# Altium PCB matrix_8x8_ws2812_LEDs.PcbDoc (part 2 of 2)
Units mm, origin at the board's own origin, x right, y up, seen from the top; angles counter-clockwise.
Board outline 65 x 70 mm, 2 copper layers (Top Layer, Bottom Layer); 134 components, 67 nets, 393 pads, 128 vias.
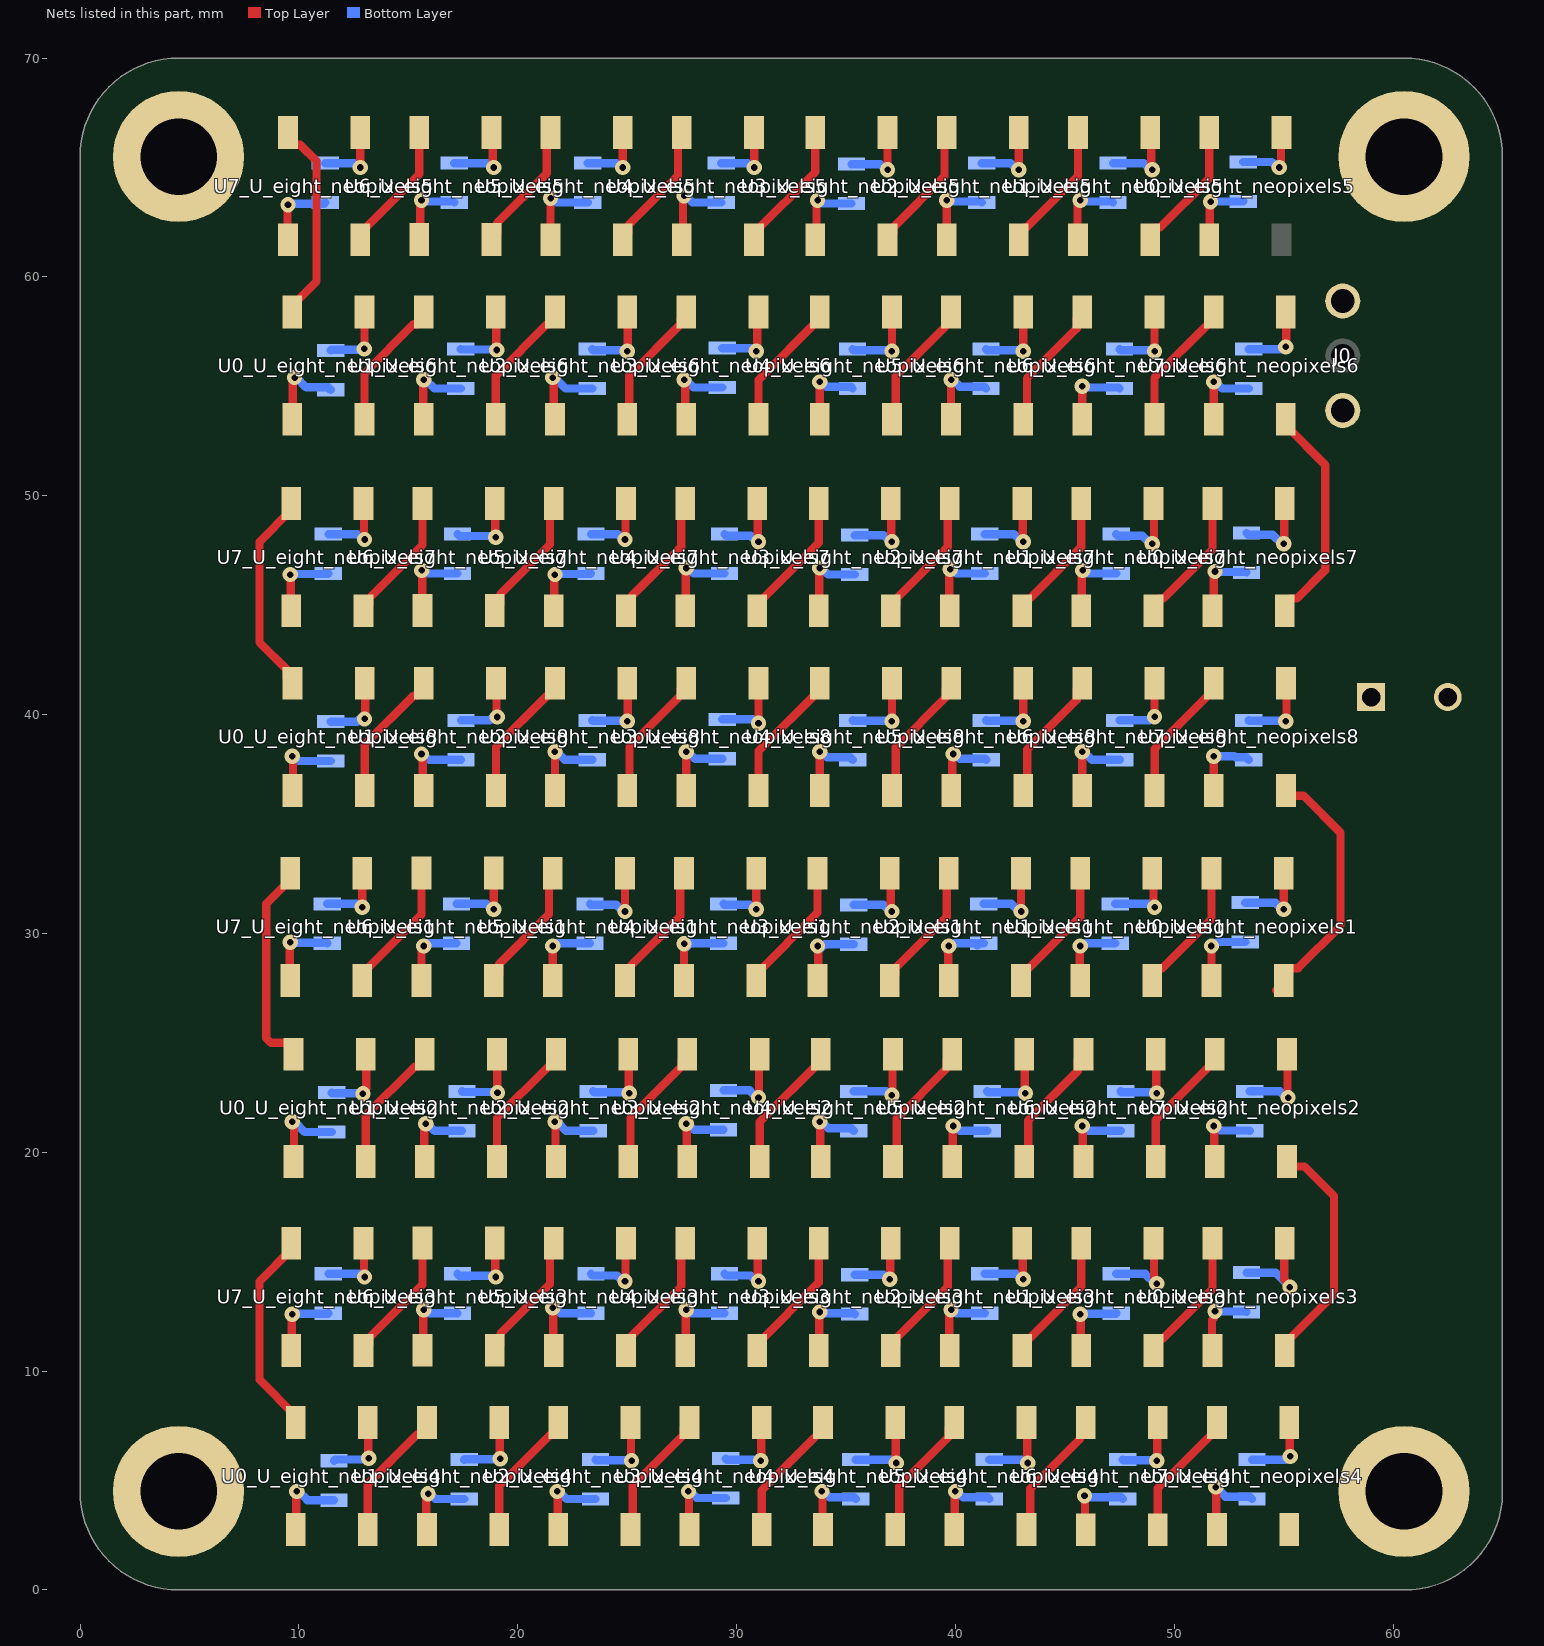
[diagram p2: the nets of this part, all layers, seen from the top]

## Via types
v1: diameter 0.7, hole 0.3, Top Layer to Bottom Layer, 128 vias

## Nets (pads, with @x,y where several pads share a name; then routed paths per layer and width w, separated by ;. In a path a pad name is that pad's centre, name@x,y a point inside that pad or via, vN(x,y) a via of type N, cw(c..) or ccw(c..) an arc to the next point about the centre after c; other vN are vias at no path point) (continued)
GND_U_eight_neopixels1: C0.2 C0_U_eight_neopixels1.1 C0_U_eight_neopixels2.1 C0_U_eight_neopixels3.1 C0_U_eight_neopixels4.1 C0_U_eight_neopixels5.1 C0_U_eight_neopixels6.1 C0_U_eight_neopixels7.1 C0_U_eight_neopixels8.1 C1_U_eight_neopixels1.1 C1_U_eight_neopixels2.1 C1_U_eight_neopixels3.1 C1_U_eight_neopixels4.1 C1_U_eight_neopixels5.1 C1_U_eight_neopixels6.1 C1_U_eight_neopixels7.1 C1_U_eight_neopixels8.1 C2_U_eight_neopixels1.1 C2_U_eight_neopixels2.1 C2_U_eight_neopixels3.1 C2_U_eight_neopixels4.1 C2_U_eight_neopixels5.1 C2_U_eight_neopixels6.1 C2_U_eight_neopixels7.1 C2_U_eight_neopixels8.1 C3_U_eight_neopixels1.1 C3_U_eight_neopixels2.1 C3_U_eight_neopixels3.1 C3_U_eight_neopixels4.1 C3_U_eight_neopixels5.1 C3_U_eight_neopixels6.1 C3_U_eight_neopixels7.1 C3_U_eight_neopixels8.1 C4_U_eight_neopixels1.1 C4_U_eight_neopixels2.1 C4_U_eight_neopixels3.1 C4_U_eight_neopixels4.1 C4_U_eight_neopixels5.1 C4_U_eight_neopixels6.1 C4_U_eight_neopixels7.1 C4_U_eight_neopixels8.1 C5_U_eight_neopixels1.1 C5_U_eight_neopixels2.1 C5_U_eight_neopixels3.1 C5_U_eight_neopixels4.1 C5_U_eight_neopixels5.1 C5_U_eight_neopixels6.1 C5_U_eight_neopixels7.1 C5_U_eight_neopixels8.1 C6_U_eight_neopixels1.1 C6_U_eight_neopixels2.1 C6_U_eight_neopixels3.1 C6_U_eight_neopixels4.1 C6_U_eight_neopixels5.1 C6_U_eight_neopixels6.1 C6_U_eight_neopixels7.1 C6_U_eight_neopixels8.1 C7_U_eight_neopixels1.1 C7_U_eight_neopixels2.1 C7_U_eight_neopixels3.1 C7_U_eight_neopixels4.1 C7_U_eight_neopixels5.1 C7_U_eight_neopixels6.1 C7_U_eight_neopixels7.1 C7_U_eight_neopixels8.1 Designator3.1 Designator4.1 Designator5.1 Designator6.1 J0.3 U0_U_eight_neopixels1.3 U0_U_eight_neopixels2.3 U0_U_eight_neopixels3.3 U0_U_eight_neopixels4.3 U0_U_eight_neopixels5.3 U0_U_eight_neopixels6.3 U0_U_eight_neopixels7.3 U0_U_eight_neopixels8.3 U1_U_eight_neopixels1.3 U1_U_eight_neopixels2.3 U1_U_eight_neopixels3.3 U1_U_eight_neopixels4.3 U1_U_eight_neopixels5.3 U1_U_eight_neopixels6.3 U1_U_eight_neopixels7.3 U1_U_eight_neopixels8.3 U2_U_eight_neopixels1.3 U2_U_eight_neopixels2.3 U2_U_eight_neopixels3.3 U2_U_eight_neopixels4.3 U2_U_eight_neopixels5.3 U2_U_eight_neopixels6.3 U2_U_eight_neopixels7.3 U2_U_eight_neopixels8.3 U3_U_eight_neopixels1.3 U3_U_eight_neopixels2.3 U3_U_eight_neopixels3.3 U3_U_eight_neopixels4.3 U3_U_eight_neopixels5.3 U3_U_eight_neopixels6.3 U3_U_eight_neopixels7.3 U3_U_eight_neopixels8.3 U4_U_eight_neopixels1.3 U4_U_eight_neopixels2.3 U4_U_eight_neopixels3.3 U4_U_eight_neopixels4.3 U4_U_eight_neopixels5.3 U4_U_eight_neopixels6.3 U4_U_eight_neopixels7.3 U4_U_eight_neopixels8.3 U5_U_eight_neopixels1.3 U5_U_eight_neopixels2.3 U5_U_eight_neopixels3.3 U5_U_eight_neopixels4.3 U5_U_eight_neopixels5.3 U5_U_eight_neopixels6.3 U5_U_eight_neopixels7.3 U5_U_eight_neopixels8.3 U6_U_eight_neopixels1.3 U6_U_eight_neopixels2.3 U6_U_eight_neopixels3.3 U6_U_eight_neopixels4.3 U6_U_eight_neopixels5.3 U6_U_eight_neopixels6.3 U6_U_eight_neopixels7.3 U6_U_eight_neopixels8.3 U7_U_eight_neopixels1.3 U7_U_eight_neopixels2.3 U7_U_eight_neopixels3.3 U7_U_eight_neopixels4.3 U7_U_eight_neopixels5.3 U7_U_eight_neopixels6.3 U7_U_eight_neopixels7.3 U7_U_eight_neopixels8.3 | length 221.1
  Top Layer w0.381: U7_U_eight_neopixels5.3@9.5,61.7 9.476,61.724 9.476,63.276 v1(9.5,63.3) ; U7_U_eight_neopixels1.3@9.6,27.85 9.576,27.874 9.576,29.576 v1(9.6,29.6) ; v1(9.6,46.4) 9.624,46.376 9.624,44.769 U7_U_eight_neopixels7.3@9.648,44.745 ; U7_U_eight_neopixels3.3@9.648,10.945 9.674,10.971 9.674,12.574 v1(9.7,12.6) ; v1(12.925,22.675) 12.925,22.761 13.076,22.911 13.076,24.456 U0_U_eight_neopixels2.3@13.052,24.481 ; v1(12.99,56.71) 12.995,56.715 12.995,58.395 U0_U_eight_neopixels6.3@13,58.4 ; U0_U_eight_neopixels8.3@13.004,41.434 13.028,41.41 13.028,40.003 v1@13.052,39.979 ; U0_U_eight_neopixels4.3@13.152,7.655 13.17,7.637 13.17,6.03 v1(13.188,6.012) ; U6_U_eight_neopixels5.3@15.502,61.705 15.551,61.754 15.551,63.451 v1(15.6,63.5) ; v1@15.6,29.35 15.601,29.349 15.601,27.856 U6_U_eight_neopixels1.3@15.602,27.855 ; v1(15.612,46.588) 15.631,46.569 15.631,44.769 U6_U_eight_neopixels7.3@15.65,44.75 ; U6_U_eight_neopixels3.3@15.65,10.95 15.675,10.975 15.675,12.775 v1(15.7,12.8) ; U1_U_eight_neopixels6.3@19,58.4 19.02,58.38 19.02,56.68 v1(19.04,56.66) ; U1_U_eight_neopixels8.3@19.004,41.434 19.028,41.41 19.028,40.003 v1@19.052,39.979 ; U1_U_eight_neopixels2.3@19.052,24.481 19.064,24.469 19.064,22.736 v1(19.075,22.725) ; U1_U_eight_neopixels4.3@19.152,7.655 19.176,7.631 19.176,6.024 v1(19.2,6) ; U5_U_eight_neopixels5.3@21.5,61.7 v1(21.5,63.6) ; v1(21.6,12.9) 21.624,12.876 21.624,10.969 U5_U_eight_neopixels3.3@21.648,10.945 ; U5_U_eight_neopixels1.3@21.6,27.85 v1(21.6,29.426) ; U5_U_eight_neopixels7.3@21.648,44.745 21.674,44.771 21.674,46.374 v1(21.7,46.4) ; v1(25,39.7) 25.028,39.728 25.028,41.41 U2_U_eight_neopixels8.3@25.004,41.434 ; v1(25,56.6) 25.024,56.624 25.024,58.376 U2_U_eight_neopixels6.3@25,58.4 ; U2_U_eight_neopixels2.3@25.052,24.481 25.076,24.456 25.076,22.724 v1(25.1,22.7) ; U2_U_eight_neopixels4.3@25.152,7.655 25.176,7.631 25.176,5.924 v1(25.2,5.9) ; U4_U_eight_neopixels5.3@27.5,61.7 27.55,61.75 27.55,63.65 v1(27.6,63.7) ; U4_U_eight_neopixels1.3@27.6,27.85 v1@27.6,29.35 ; U4_U_eight_neopixels3.3@27.648,10.945 27.674,10.971 27.674,12.774 v1(27.7,12.8) ; U4_U_eight_neopixels7.3@27.648,44.745 27.674,44.771 27.674,46.674 v1(27.7,46.7) ; v1(30.9,56.6) 30.95,56.65 30.95,58.35 U3_U_eight_neopixels6.3@31,58.4 ; v1(31,22.5) 31.026,22.526 31.026,24.455 U3_U_eight_neopixels2.3@31.052,24.481 ; v1(31,39.6) 31.002,39.602 31.002,41.432 U3_U_eight_neopixels8.3@31.004,41.434 ; v1(31.1,5.9) 31.126,5.926 31.126,7.629 U3_U_eight_neopixels4.3@31.152,7.655 ; U3_U_eight_neopixels5.3@33.6,61.7 33.65,61.75 33.65,63.45 v1(33.7,63.5) ; U3_U_eight_neopixels1.3@33.7,27.85 33.726,27.876 33.726,29.279 v1@33.752,29.305 ; U3_U_eight_neopixels3.3@33.748,10.945 33.774,10.971 33.774,12.674 v1(33.8,12.7) ; U3_U_eight_neopixels7.3@33.748,44.745 33.774,44.771 33.774,46.674 v1(33.8,46.7) ; v1(37.1,22.6) 37.126,22.626 37.126,24.455 U4_U_eight_neopixels2.3@37.152,24.481 ; v1(37.1,39.7) 37.102,39.702 37.102,41.433 U4_U_eight_neopixels8.3@37.104,41.435 ; v1(37.1,56.6) U4_U_eight_neopixels6.3@37.1,58.4 ; U4_U_eight_neopixels4.3@37.252,7.655 37.276,7.631 37.276,5.824 v1(37.3,5.8) ; U2_U_eight_neopixels5.3@39.6,61.7 v1(39.6,63.5) ; v1@39.652,29.305 39.652,29.302 39.6,29.25 39.676,29.174 39.676,27.874 U2_U_eight_neopixels1.3@39.7,27.85 ; U2_U_eight_neopixels3.3@39.748,10.945 39.724,10.969 39.724,12.638 39.8,12.714 v1(39.8,12.8) ; U2_U_eight_neopixels7.3@39.748,44.745 39.724,44.769 39.724,46.6 v1(39.762,46.638) ; v1(43.1,39.7) 43.102,39.702 43.102,41.433 U5_U_eight_neopixels8.3@43.104,41.435 ; v1(43.1,56.6) U5_U_eight_neopixels6.3@43.1,58.4 ; U5_U_eight_neopixels2.3@43.152,24.481 43.176,24.457 43.176,22.724 v1(43.2,22.7) ; U5_U_eight_neopixels4.3@43.252,7.655 43.276,7.631 43.276,5.824 v1(43.3,5.8) ; U1_U_eight_neopixels5.3@45.6,61.7 45.576,61.724 45.576,63.29 45.7,63.414 v1(45.7,63.5) ; v1@45.652,29.305 45.676,29.281 45.676,27.874 U1_U_eight_neopixels1.3@45.7,27.85 ; v1(45.7,12.6) 45.724,12.576 45.724,10.969 U1_U_eight_neopixels3.3@45.748,10.945 ; U1_U_eight_neopixels7.3@45.748,44.745 45.78,44.777 45.78,46.556 v1(45.812,46.588) ; U6_U_eight_neopixels6.3@49.098,58.395 49.099,58.394 49.099,56.601 v1(49.1,56.6) ; v1(49.1,39.9) 49.101,39.901 U6_U_eight_neopixels8.3@49.102,41.43 U6_U_eight_neopixels8.3@49.102,41.43 ; U6_U_eight_neopixels2.3@49.15,24.476 49.175,24.451 49.175,22.725 v1(49.2,22.7) ; v1(49.2,5.9) 49.225,5.925 49.225,7.625 U6_U_eight_neopixels4.3@49.25,7.65 ; U0_U_eight_neopixels5.3@51.6,61.7 51.63,61.73 51.63,63.41 v1(51.66,63.44) ; U0_U_eight_neopixels1.3@51.7,27.85 v1(51.7,29.426) ; U0_U_eight_neopixels3.3@51.748,10.945 51.724,10.969 51.724,12.338 51.801,12.414 51.801,12.677 v1(51.862,12.738) ; U0_U_eight_neopixels7.3@51.748,44.745 51.805,44.802 51.805,46.481 v1(51.862,46.538) ; v1(55.1,39.7) 55.128,39.728 55.128,41.41 U7_U_eight_neopixels8.3@55.104,41.435 ; U7_U_eight_neopixels6.3@55.1,58.4 55.124,58.376 55.124,56.976 55.155,56.945 v1@55.148,56.945 ; U7_U_eight_neopixels2.3@55.152,24.481 55.176,24.457 55.176,22.524 v1(55.2,22.5) ; U7_U_eight_neopixels4.3@55.252,7.655 55.276,7.631 55.276,6.124 v1(55.3,6.1)
  Bottom Layer w0.381: v1(9.5,63.3) 9.55,63.35 11.15,63.35 C3_U_eight_neopixels5.1@11.2,63.4 ; v1(9.6,29.6) 9.625,29.575 11.275,29.575 C3_U_eight_neopixels1.1@11.3,29.55 ; v1(9.6,46.4) 9.622,46.422 11.326,46.422 C3_U_eight_neopixels7.1@11.348,46.445 ; v1(9.7,12.6) 9.723,12.622 11.326,12.622 C3_U_eight_neopixels3.1@11.348,12.645 ; C4_U_eight_neopixels6.1@11.448,56.645 11.481,56.678 12.957,56.678 v1(12.99,56.71) ; C4_U_eight_neopixels8.1@11.452,39.679 12.666,39.679 12.966,39.979 v1@13.052,39.979 ; C4_U_eight_neopixels2.1@11.5,22.726 11.525,22.7 12.9,22.7 v1(12.925,22.675) ; C4_U_eight_neopixels4.1@11.6,5.9 11.656,5.956 13.132,5.956 v1(13.188,6.012) ; v1@15.6,29.35 15.686,29.35 15.886,29.55 C2_U_eight_neopixels1.1@17.2,29.55 ; v1(15.6,63.5) 15.65,63.45 17.05,63.45 C2_U_eight_neopixels5.1@17.1,63.4 ; v1(15.612,46.588) 15.698,46.588 15.841,46.445 C2_U_eight_neopixels7.1@17.248,46.445 ; v1(15.7,12.8) 15.786,12.8 15.941,12.645 C2_U_eight_neopixels3.1@17.248,12.645 ; C5_U_eight_neopixels6.1@17.4,56.7 17.42,56.68 19.02,56.68 v1(19.04,56.66) ; C5_U_eight_neopixels8.1@17.404,39.734 18.721,39.734 18.966,39.979 v1@19.052,39.979 ; C5_U_eight_neopixels2.1@17.452,22.781 17.48,22.753 19.047,22.753 v1(19.075,22.725) ; C5_U_eight_neopixels4.1@17.552,5.955 17.575,5.977 19.177,5.977 v1(19.2,6) ; v1(21.5,63.6) 21.586,63.6 21.786,63.4 C1_U_eight_neopixels5.1@23.2,63.4 ; v1(21.6,12.9) 21.686,12.9 21.941,12.645 C1_U_eight_neopixels3.1@23.348,12.645 ; v1(21.6,29.426) 21.686,29.426 21.811,29.55 C1_U_eight_neopixels1.1@23.3,29.55 ; v1(21.7,46.4) 21.722,46.422 23.326,46.422 C1_U_eight_neopixels7.1@23.348,46.445 ; C6_U_eight_neopixels6.1@23.4,56.7 23.45,56.65 24.95,56.65 v1(25,56.6) ; C6_U_eight_neopixels8.1@23.404,39.734 23.421,39.717 24.983,39.717 v1(25,39.7) ; C6_U_eight_neopixels2.1@23.452,22.781 23.492,22.74 25.06,22.74 v1(25.1,22.7) ; C6_U_eight_neopixels4.1@23.552,5.955 23.58,5.927 25.173,5.927 v1(25.2,5.9) ; v1@27.6,29.35 27.686,29.35 27.886,29.55 C0_U_eight_neopixels1.1@29.4,29.55 ; v1(27.6,63.7) 27.686,63.7 27.986,63.4 C0_U_eight_neopixels5.1@29.3,63.4 ; v1(27.7,12.8) 27.786,12.8 27.941,12.645 C0_U_eight_neopixels3.1@29.448,12.645 ; v1(27.7,46.7) 27.786,46.7 28.041,46.445 C0_U_eight_neopixels7.1@29.448,46.445 ; C7_U_eight_neopixels6.1@29.348,56.745 30.669,56.745 30.814,56.6 v1(30.9,56.6) ; C7_U_eight_neopixels8.1@29.352,39.779 30.734,39.779 30.914,39.6 v1(31,39.6) ; C7_U_eight_neopixels2.1@29.4,22.826 30.596,22.826 30.922,22.5 v1(31,22.5) ; C7_U_eight_neopixels4.1@29.5,6 29.55,5.95 31.05,5.95 v1(31.1,5.9) ; v1(33.7,63.5) 33.786,63.5 33.931,63.355 C7_U_eight_neopixels5.1@35.252,63.355 ; v1@33.752,29.305 33.838,29.305 34.038,29.505 C7_U_eight_neopixels1.1@35.352,29.505 ; v1(33.8,12.7) 33.85,12.65 35.35,12.65 C7_U_eight_neopixels3.1@35.4,12.6 ; v1(33.8,46.7) 33.886,46.7 34.186,46.4 C7_U_eight_neopixels7.1@35.4,46.4 ; C0_U_eight_neopixels6.1@35.3,56.7 35.35,56.65 37.05,56.65 v1(37.1,56.6) ; C0_U_eight_neopixels8.1@35.304,39.734 35.321,39.717 37.083,39.717 v1(37.1,39.7) ; C0_U_eight_neopixels2.1@35.352,22.781 36.833,22.781 37.014,22.6 v1(37.1,22.6) ; C0_U_eight_neopixels4.1@35.452,5.955 37.059,5.955 37.214,5.8 v1(37.3,5.8) ; v1(39.6,63.5) 39.65,63.45 41.15,63.45 C6_U_eight_neopixels5.1@41.2,63.4 ; v1@39.652,29.305 39.738,29.305 39.983,29.55 40.9,29.55 41,29.45 41.1,29.55 C6_U_eight_neopixels1.1@41.3,29.55 ; v1(39.762,46.638) 39.848,46.638 40.041,46.445 C6_U_eight_neopixels7.1@41.348,46.445 ; v1(39.8,12.8) 39.886,12.8 40.041,12.645 C6_U_eight_neopixels3.1@41.348,12.645 ; C1_U_eight_neopixels6.1@41.4,56.7 41.45,56.65 43.05,56.65 v1(43.1,56.6) ; C1_U_eight_neopixels8.1@41.404,39.734 41.421,39.717 43.083,39.717 v1(43.1,39.7) ; C1_U_eight_neopixels2.1@41.452,22.781 41.492,22.74 43.16,22.74 v1(43.2,22.7) ; C1_U_eight_neopixels4.1@41.552,5.955 43.059,5.955 43.214,5.8 v1(43.3,5.8) ; v1@45.652,29.305 45.738,29.305 45.983,29.55 C5_U_eight_neopixels1.1@47.3,29.55 ; v1(45.7,12.6) 45.722,12.622 47.326,12.622 C5_U_eight_neopixels3.1@47.348,12.645 ; v1(45.7,63.5) 45.75,63.45 47.15,63.45 C5_U_eight_neopixels5.1@47.2,63.4 ; v1(45.812,46.588) 45.898,46.588 46.041,46.445 C5_U_eight_neopixels7.1@47.348,46.445 ; C2_U_eight_neopixels6.1@47.5,56.7 47.55,56.65 49.05,56.65 v1(49.1,56.6) ; C2_U_eight_neopixels8.1@47.504,39.734 48.848,39.734 49.014,39.9 v1(49.1,39.9) ; C2_U_eight_neopixels2.1@47.552,22.781 47.592,22.74 49.16,22.74 v1(49.2,22.7) ; C2_U_eight_neopixels4.1@47.652,5.955 47.68,5.927 49.173,5.927 v1(49.2,5.9) ; v1(51.66,63.44) 51.668,63.447 53.144,63.447 C4_U_eight_neopixels5.1@53.152,63.455 ; v1(51.7,29.426) 51.786,29.426 51.966,29.605 C4_U_eight_neopixels1.1@53.252,29.605 ; v1(51.862,12.738) 51.881,12.719 53.281,12.719 C4_U_eight_neopixels3.1@53.3,12.7 ; v1(51.862,46.538) 51.881,46.519 53.281,46.519 C4_U_eight_neopixels7.1@53.3,46.5 ; C3_U_eight_neopixels6.1@53.4,56.7 54.817,56.7 55.062,56.945 v1@55.148,56.945 ; C3_U_eight_neopixels8.1@53.404,39.734 53.421,39.717 55.083,39.717 v1(55.1,39.7) ; C3_U_eight_neopixels2.1@53.452,22.781 54.833,22.781 55.114,22.5 v1(55.2,22.5) ; C3_U_eight_neopixels4.1@53.552,5.955 55.069,5.955 55.214,6.1 v1(55.3,6.1)
  other v1: 15.7,29.426 33.7,29.426 39.7,29.426 45.7,29.426 27.6,29.526 13,39.8 19.06,39.89 55.1,56.8
NetU0_U_eight_neopixels1_2: U0_U_eight_neopixels1.2 U1_U_eight_neopixels1.4 | length 6.1
  Top Layer w0.381: U1_U_eight_neopixels1.4@49,27.85 49,28.15 49.259,28.41 49.457,28.41 51.7,30.653 U0_U_eight_neopixels1.2@51.7,32.75
NetU0_U_eight_neopixels1_4: U0_U_eight_neopixels1.4 U7_U_eight_neopixels8.2 | length 12
  Top Layer w0.381: U0_U_eight_neopixels1.4@54.648,27.395 55.051,27.799 55.051,28.201 55.26,28.41 55.662,28.41 57.6,30.347 57.6,34.6 55.902,36.298 55.341,36.298 U7_U_eight_neopixels8.2@55.104,36.535
NetU0_U_eight_neopixels2_2: U0_U_eight_neopixels2.2 U1_U_eight_neopixels2.4 | length 6.1
  Top Layer w0.381: U0_U_eight_neopixels2.2@13.052,19.581 13.052,21.678 15.295,23.921 15.493,23.921 15.752,24.181 U1_U_eight_neopixels2.4@15.752,24.481
NetU0_U_eight_neopixels2_4: U0_U_eight_neopixels2.4 U7_U_eight_neopixels1.2 | length 9.7
  Top Layer w0.381: U7_U_eight_neopixels1.2@9.6,32.75 9.6,32.45 8.5,31.35 8.5,25.223 8.723,25 9.492,25 9.752,24.74 U0_U_eight_neopixels2.4@9.752,24.481
NetU0_U_eight_neopixels3_2: U0_U_eight_neopixels3.2 U1_U_eight_neopixels3.4 | length 6.1
  Top Layer w0.381: U1_U_eight_neopixels3.4@49.048,10.945 49.048,11.245 49.308,11.504 49.505,11.504 51.748,13.748 U0_U_eight_neopixels3.2@51.748,15.845
NetU0_U_eight_neopixels3_4: U0_U_eight_neopixels3.4 U7_U_eight_neopixels2.2 | length 10.8
  Top Layer w0.381: U0_U_eight_neopixels3.4@55.048,10.945 55.048,11.245 57.3,13.497 57.3,18 55.95,19.35 55.383,19.35 U7_U_eight_neopixels2.2@55.152,19.581
NetU0_U_eight_neopixels4_2: U0_U_eight_neopixels4.2 U1_U_eight_neopixels4.4 | length 6.1
  Top Layer w0.381: U0_U_eight_neopixels4.2@13.152,2.755 13.152,4.852 15.396,7.095 15.593,7.095 15.852,7.355 U1_U_eight_neopixels4.4@15.852,7.655
NetU0_U_eight_neopixels4_4: U0_U_eight_neopixels4.4 U7_U_eight_neopixels3.2 | length 9.5
  Top Layer w0.381: U7_U_eight_neopixels3.2@9.648,15.845 9.648,15.545 8.2,14.097 8.2,9.607 9.852,7.955 U0_U_eight_neopixels4.4@9.852,7.655
NetU0_U_eight_neopixels5_2: U0_U_eight_neopixels5.2 U1_U_eight_neopixels5.4 | length 6.1
  Top Layer w0.381: U1_U_eight_neopixels5.4@48.9,61.7 48.9,62 49.16,62.259 49.357,62.259 51.6,64.503 U0_U_eight_neopixels5.2@51.6,66.6
NetU0_U_eight_neopixels6_2: U0_U_eight_neopixels6.2 U1_U_eight_neopixels6.4 | length 6.1
  Top Layer w0.381: U0_U_eight_neopixels6.2@13,53.5 13,55.597 15.244,57.84 15.441,57.84 15.7,58.1 U1_U_eight_neopixels6.4@15.7,58.4
NetU0_U_eight_neopixels6_4: U0_U_eight_neopixels6.4 U7_U_eight_neopixels5.2 | length 9.4
  Top Layer w0.381: U7_U_eight_neopixels5.2@9.5,66.6 9.5,66.3 9.76,66.04 10.06,66.04 10.8,65.3 10.8,59.8 9.7,58.7 U0_U_eight_neopixels6.4@9.7,58.4
NetU0_U_eight_neopixels7_2: U0_U_eight_neopixels7.2 U1_U_eight_neopixels7.4 | length 6.1
  Top Layer w0.381: U1_U_eight_neopixels7.4@49.048,44.745 49.048,45.045 49.308,45.304 49.505,45.304 51.748,47.548 U0_U_eight_neopixels7.2@51.748,49.645
NetU0_U_eight_neopixels7_4: U0_U_eight_neopixels7.4 U7_U_eight_neopixels6.2 | length 10.4
  Top Layer w0.381: U0_U_eight_neopixels7.4@55.048,44.745 55.048,45.045 55.308,45.304 55.608,45.304 56.9,46.597 56.9,51.4 55.1,53.2 U7_U_eight_neopixels6.2@55.1,53.5
NetU0_U_eight_neopixels8_2: U0_U_eight_neopixels8.2 U1_U_eight_neopixels8.4 | length 6.1
  Top Layer w0.381: U0_U_eight_neopixels8.2@13.004,36.534 13.004,38.631 15.248,40.875 15.445,40.875 15.704,41.134 U1_U_eight_neopixels8.4@15.704,41.434
NetU0_U_eight_neopixels8_4: U0_U_eight_neopixels8.4 U7_U_eight_neopixels7.2 | length 9.4
  Top Layer w0.381: U7_U_eight_neopixels7.2@9.648,49.645 9.648,49.345 8.2,47.897 8.2,43.3 9.444,42.056 9.444,41.694 U0_U_eight_neopixels8.4@9.704,41.434
NetU1_U_eight_neopixels1_2: U1_U_eight_neopixels1.2 U2_U_eight_neopixels1.4 | length 6.1
  Top Layer w0.381: U2_U_eight_neopixels1.4@43,27.85 43,28.15 43.259,28.41 43.356,28.41 45.699,30.752 45.699,32.749 U1_U_eight_neopixels1.2@45.7,32.75
NetU1_U_eight_neopixels2_2: U1_U_eight_neopixels2.2 U2_U_eight_neopixels2.4 | length 6.1
  Top Layer w0.381: U1_U_eight_neopixels2.2@19.052,19.581 19.053,19.582 19.053,21.579 21.395,23.921 21.492,23.921 21.752,24.181 U2_U_eight_neopixels2.4@21.752,24.481
NetU1_U_eight_neopixels3_2: U1_U_eight_neopixels3.2 U2_U_eight_neopixels3.4 | length 6.1
  Top Layer w0.381: U2_U_eight_neopixels3.4@43.048,10.945 43.048,11.245 43.308,11.504 43.405,11.504 45.747,13.847 45.747,15.844 U1_U_eight_neopixels3.2@45.748,15.845
NetU1_U_eight_neopixels4_2: U1_U_eight_neopixels4.2 U2_U_eight_neopixels4.4 | length 6.1
  Top Layer w0.381: U1_U_eight_neopixels4.2@19.152,2.755 19.153,2.756 19.153,4.753 21.496,7.095 21.593,7.095 21.852,7.355 U2_U_eight_neopixels4.4@21.852,7.655
NetU1_U_eight_neopixels5_2: U1_U_eight_neopixels5.2 U2_U_eight_neopixels5.4 | length 6.1
  Top Layer w0.381: U2_U_eight_neopixels5.4@42.9,61.7 42.9,62 43.16,62.259 43.257,62.259 45.599,64.602 45.599,66.599 U1_U_eight_neopixels5.2@45.6,66.6
NetU1_U_eight_neopixels6_2: U1_U_eight_neopixels6.2 U2_U_eight_neopixels6.4 | length 6.1
  Top Layer w0.381: U1_U_eight_neopixels6.2@19,53.5 19.001,53.501 19.001,55.498 21.344,57.84 21.441,57.84 21.7,58.1 U2_U_eight_neopixels6.4@21.7,58.4
NetU1_U_eight_neopixels7_2: U1_U_eight_neopixels7.2 U2_U_eight_neopixels7.4 | length 6.1
  Top Layer w0.381: U2_U_eight_neopixels7.4@43.048,44.745 43.048,45.045 43.308,45.304 43.405,45.304 45.747,47.647 45.747,49.644 U1_U_eight_neopixels7.2@45.748,49.645
NetU1_U_eight_neopixels8_2: U1_U_eight_neopixels8.2 U2_U_eight_neopixels8.4 | length 6.1
  Top Layer w0.381: U1_U_eight_neopixels8.2@19.004,36.534 19.005,36.536 19.005,38.533 21.348,40.875 21.445,40.875 21.704,41.134 U2_U_eight_neopixels8.4@21.704,41.434
NetU2_U_eight_neopixels1_2: U2_U_eight_neopixels1.2 U3_U_eight_neopixels1.4 | length 6
  Top Layer w0.381: U3_U_eight_neopixels1.4@37,27.85 37.26,28.11 37.26,28.413 39.599,30.752 39.599,32.649 U2_U_eight_neopixels1.2@39.7,32.75
NetU2_U_eight_neopixels2_2: U2_U_eight_neopixels2.2 U3_U_eight_neopixels2.4 | length 6
  Top Layer w0.381: U2_U_eight_neopixels2.2@25.052,19.581 25.153,19.682 25.153,21.579 27.492,23.918 27.492,24.221 U3_U_eight_neopixels2.4@27.752,24.481
NetU2_U_eight_neopixels3_2: U2_U_eight_neopixels3.2 U3_U_eight_neopixels3.4 | length 6
  Top Layer w0.381: U3_U_eight_neopixels3.4@37.048,10.945 37.308,11.204 37.308,11.508 39.647,13.847 39.647,15.744 U2_U_eight_neopixels3.2@39.748,15.845
NetU2_U_eight_neopixels4_2: U2_U_eight_neopixels4.2 U3_U_eight_neopixels4.4 | length 6
  Top Layer w0.381: U2_U_eight_neopixels4.2@25.152,2.755 25.253,2.856 25.253,4.753 27.593,7.092 27.593,7.395 U3_U_eight_neopixels4.4@27.852,7.655
NetU2_U_eight_neopixels5_2: U2_U_eight_neopixels5.2 U3_U_eight_neopixels5.4 | length 6
  Top Layer w0.381: U3_U_eight_neopixels5.4@36.9,61.7 37.16,61.959 37.16,62.262 39.499,64.602 39.499,66.499 U2_U_eight_neopixels5.2@39.6,66.6
NetU2_U_eight_neopixels6_2: U2_U_eight_neopixels6.2 U3_U_eight_neopixels6.4 | length 6
  Top Layer w0.381: U2_U_eight_neopixels6.2@25,53.5 25.101,53.601 25.101,55.498 27.44,57.837 27.44,58.14 U3_U_eight_neopixels6.4@27.7,58.4
NetU2_U_eight_neopixels7_2: U2_U_eight_neopixels7.2 U3_U_eight_neopixels7.4 | length 6
  Top Layer w0.381: U3_U_eight_neopixels7.4@37.048,44.745 37.308,45.004 37.308,45.308 39.647,47.647 39.647,49.544 U2_U_eight_neopixels7.2@39.748,49.645
NetU2_U_eight_neopixels8_2: U2_U_eight_neopixels8.2 U3_U_eight_neopixels8.4 | length 6
  Top Layer w0.381: U2_U_eight_neopixels8.2@25.004,36.534 25.105,36.636 25.105,38.533 27.444,40.872 27.444,41.175 U3_U_eight_neopixels8.4@27.704,41.434
NetU3_U_eight_neopixels1_2: U3_U_eight_neopixels1.2 U4_U_eight_neopixels1.4 | length 6.1
  Top Layer w0.381: U4_U_eight_neopixels1.4@30.9,27.85 30.9,28.15 33.7,30.95 U3_U_eight_neopixels1.2@33.7,32.75
NetU3_U_eight_neopixels2_2: U3_U_eight_neopixels2.2 U4_U_eight_neopixels2.4 | length 6.1
  Top Layer w0.381: U3_U_eight_neopixels2.2@31.052,19.581 31.052,21.381 33.852,24.181 U4_U_eight_neopixels2.4@33.852,24.481
NetU3_U_eight_neopixels3_2: U3_U_eight_neopixels3.2 U4_U_eight_neopixels3.4 | length 6.1
  Top Layer w0.381: U4_U_eight_neopixels3.4@30.948,10.945 30.948,11.245 33.748,14.045 U3_U_eight_neopixels3.2@33.748,15.845
NetU3_U_eight_neopixels4_2: U3_U_eight_neopixels4.2 U4_U_eight_neopixels4.4 | length 6.1
  Top Layer w0.381: U3_U_eight_neopixels4.2@31.152,2.755 31.152,4.555 33.952,7.355 U4_U_eight_neopixels4.4@33.952,7.655
NetU3_U_eight_neopixels5_2: U3_U_eight_neopixels5.2 U4_U_eight_neopixels5.4 | length 6.1
  Top Layer w0.381: U4_U_eight_neopixels5.4@30.8,61.7 30.8,62 33.6,64.8 U3_U_eight_neopixels5.2@33.6,66.6
NetU3_U_eight_neopixels6_2: U3_U_eight_neopixels6.2 U4_U_eight_neopixels6.4 | length 6.1
  Top Layer w0.381: U3_U_eight_neopixels6.2@31,53.5 31,55.3 33.8,58.1 U4_U_eight_neopixels6.4@33.8,58.4
NetU3_U_eight_neopixels7_2: U3_U_eight_neopixels7.2 U4_U_eight_neopixels7.4 | length 6.1
  Top Layer w0.381: U4_U_eight_neopixels7.4@30.948,44.745 30.948,45.045 33.748,47.845 U3_U_eight_neopixels7.2@33.748,49.645
NetU3_U_eight_neopixels8_2: U3_U_eight_neopixels8.2 U4_U_eight_neopixels8.4 | length 6.1
  Top Layer w0.381: U3_U_eight_neopixels8.2@31.004,36.534 31.004,38.335 33.804,41.135 U4_U_eight_neopixels8.4@33.804,41.435
NetU4_U_eight_neopixels1_2: U4_U_eight_neopixels1.2 U5_U_eight_neopixels1.4 | length 6
  Top Layer w0.381: U5_U_eight_neopixels1.4@24.9,27.85 25.16,28.109 25.16,28.513 27.425,30.778 27.425,32.575 U4_U_eight_neopixels1.2@27.6,32.75
NetU4_U_eight_neopixels2_2: U4_U_eight_neopixels2.2 U5_U_eight_neopixels2.4 | length 6
  Top Layer w0.381: U4_U_eight_neopixels2.2@37.152,19.581 37.327,19.755 37.327,21.552 39.592,23.818 39.592,24.221 U5_U_eight_neopixels2.4@39.852,24.481
NetU4_U_eight_neopixels3_2: U4_U_eight_neopixels3.2 U5_U_eight_neopixels3.4 | length 6
  Top Layer w0.381: U5_U_eight_neopixels3.4@24.948,10.945 25.208,11.204 25.208,11.608 27.473,13.873 27.473,15.67 U4_U_eight_neopixels3.2@27.648,15.845
NetU4_U_eight_neopixels4_2: U4_U_eight_neopixels4.2 U5_U_eight_neopixels4.4 | length 6
  Top Layer w0.381: U4_U_eight_neopixels4.2@37.252,2.755 37.427,2.93 37.427,4.727 39.692,6.992 39.692,7.395 U5_U_eight_neopixels4.4@39.952,7.655
NetU4_U_eight_neopixels5_2: U4_U_eight_neopixels5.2 U5_U_eight_neopixels5.4 | length 6
  Top Layer w0.381: U5_U_eight_neopixels5.4@24.8,61.7 25.06,61.959 25.06,62.362 27.325,64.628 27.325,66.425 U4_U_eight_neopixels5.2@27.5,66.6
NetU4_U_eight_neopixels6_2: U4_U_eight_neopixels6.2 U5_U_eight_neopixels6.4 | length 6
  Top Layer w0.381: U4_U_eight_neopixels6.2@37.1,53.5 37.275,53.675 37.275,55.472 39.54,57.737 39.54,58.141 U5_U_eight_neopixels6.4@39.8,58.4
NetU4_U_eight_neopixels7_2: U4_U_eight_neopixels7.2 U5_U_eight_neopixels7.4 | length 6
  Top Layer w0.381: U5_U_eight_neopixels7.4@24.948,44.745 25.208,45.004 25.208,45.408 27.473,47.673 27.473,49.47 U4_U_eight_neopixels7.2@27.648,49.645
NetU4_U_eight_neopixels8_2: U4_U_eight_neopixels8.2 U5_U_eight_neopixels8.4 | length 6
  Top Layer w0.381: U4_U_eight_neopixels8.2@37.104,36.535 37.279,36.709 37.279,38.506 39.544,40.772 39.544,41.175 U5_U_eight_neopixels8.4@39.804,41.435
NetU5_U_eight_neopixels1_2: U5_U_eight_neopixels1.2 U6_U_eight_neopixels1.4 | length 6
  Top Layer w0.381: U6_U_eight_neopixels1.4@18.902,27.855 19.162,28.114 19.162,28.615 21.425,30.878 21.425,32.575 U5_U_eight_neopixels1.2@21.6,32.75
NetU5_U_eight_neopixels2_2: U5_U_eight_neopixels2.2 U6_U_eight_neopixels2.4 | length 6
  Top Layer w0.381: U5_U_eight_neopixels2.2@43.152,19.581 43.327,19.755 43.327,21.452 45.59,23.716 45.59,24.216 U6_U_eight_neopixels2.4@45.85,24.476
NetU5_U_eight_neopixels3_2: U5_U_eight_neopixels3.2 U6_U_eight_neopixels3.4 | length 6
  Top Layer w0.381: U6_U_eight_neopixels3.4@18.95,10.95 19.21,11.209 19.21,11.709 21.473,13.973 21.473,15.67 U5_U_eight_neopixels3.2@21.648,15.845
NetU5_U_eight_neopixels4_2: U5_U_eight_neopixels4.2 U6_U_eight_neopixels4.4 | length 6
  Top Layer w0.381: U5_U_eight_neopixels4.2@43.252,2.755 43.427,2.93 43.427,4.627 45.691,6.89 45.691,7.391 U6_U_eight_neopixels4.4@45.95,7.65
NetU5_U_eight_neopixels5_2: U5_U_eight_neopixels5.2 U6_U_eight_neopixels5.4 | length 6
  Top Layer w0.381: U6_U_eight_neopixels5.4@18.802,61.705 19.062,61.964 19.062,62.464 21.325,64.728 21.325,66.425 U5_U_eight_neopixels5.2@21.5,66.6
NetU5_U_eight_neopixels6_2: U5_U_eight_neopixels6.2 U6_U_eight_neopixels6.4 | length 6
  Top Layer w0.381: U5_U_eight_neopixels6.2@43.1,53.5 43.275,53.675 43.275,55.372 45.538,57.635 45.538,58.136 U6_U_eight_neopixels6.4@45.798,58.395
NetU5_U_eight_neopixels7_2: U5_U_eight_neopixels7.2 U6_U_eight_neopixels7.4 | length 6
  Top Layer w0.381: U6_U_eight_neopixels7.4@18.95,44.75 19.21,45.009 19.21,45.51 21.473,47.773 21.473,49.47 U5_U_eight_neopixels7.2@21.648,49.645
NetU5_U_eight_neopixels8_2: U5_U_eight_neopixels8.2 U6_U_eight_neopixels8.4 | length 6
  Top Layer w0.381: U5_U_eight_neopixels8.2@43.104,36.535 43.279,36.709 43.279,38.406 45.542,40.67 45.542,41.17 U6_U_eight_neopixels8.4@45.802,41.43
NetU6_U_eight_neopixels1_2: U6_U_eight_neopixels1.2 U7_U_eight_neopixels1.4 | length 6
  Top Layer w0.381: U7_U_eight_neopixels1.4@12.9,27.85 13.16,28.109 13.16,28.413 15.602,30.855 U6_U_eight_neopixels1.2@15.602,32.755
NetU6_U_eight_neopixels2_2: U6_U_eight_neopixels2.2 U7_U_eight_neopixels2.4 | length 6
  Top Layer w0.381: U6_U_eight_neopixels2.2@49.15,19.576 49.15,21.475 51.592,23.918 51.592,24.221 U7_U_eight_neopixels2.4@51.852,24.481
NetU6_U_eight_neopixels3_2: U6_U_eight_neopixels3.2 U7_U_eight_neopixels3.4 | length 6
  Top Layer w0.381: U7_U_eight_neopixels3.4@12.948,10.945 13.208,11.204 13.208,11.508 15.65,13.95 U6_U_eight_neopixels3.2@15.65,15.85
NetU6_U_eight_neopixels4_2: U6_U_eight_neopixels4.2 U7_U_eight_neopixels4.4 | length 6
  Top Layer w0.381: U6_U_eight_neopixels4.2@49.25,2.75 49.25,4.65 51.693,7.092 51.693,7.395 U7_U_eight_neopixels4.4@51.952,7.655
NetU6_U_eight_neopixels5_2: U6_U_eight_neopixels5.2 U7_U_eight_neopixels5.4 | length 6
  Top Layer w0.381: U7_U_eight_neopixels5.4@12.8,61.7 13.06,61.959 13.06,62.262 15.502,64.705 U6_U_eight_neopixels5.2@15.502,66.605
NetU6_U_eight_neopixels6_2: U6_U_eight_neopixels6.2 U7_U_eight_neopixels6.4 | length 6
  Top Layer w0.381: U6_U_eight_neopixels6.2@49.098,53.495 49.098,55.395 51.54,57.837 51.54,58.141 U7_U_eight_neopixels6.4@51.8,58.4
NetU6_U_eight_neopixels7_2: U6_U_eight_neopixels7.2 U7_U_eight_neopixels7.4 | length 6
  Top Layer w0.381: U7_U_eight_neopixels7.4@12.948,44.745 13.208,45.004 13.208,45.308 15.65,47.75 U6_U_eight_neopixels7.2@15.65,49.65
NetU6_U_eight_neopixels8_2: U6_U_eight_neopixels8.2 U7_U_eight_neopixels8.4 | length 6
  Top Layer w0.381: U6_U_eight_neopixels8.2@49.102,36.53 49.102,38.429 51.544,40.872 51.544,41.175 U7_U_eight_neopixels8.4@51.804,41.435
NetU7_U_eight_neopixels4_2: U7_U_eight_neopixels4.2
VCC_U_eight_neopixels1: C0.1 C0_U_eight_neopixels1.2 C0_U_eight_neopixels2.2 C0_U_eight_neopixels3.2 C0_U_eight_neopixels4.2 C0_U_eight_neopixels5.2 C0_U_eight_neopixels6.2 C0_U_eight_neopixels7.2 C0_U_eight_neopixels8.2 C1_U_eight_neopixels1.2 C1_U_eight_neopixels2.2 C1_U_eight_neopixels3.2 C1_U_eight_neopixels4.2 C1_U_eight_neopixels5.2 C1_U_eight_neopixels6.2 C1_U_eight_neopixels7.2 C1_U_eight_neopixels8.2 C2_U_eight_neopixels1.2 C2_U_eight_neopixels2.2 C2_U_eight_neopixels3.2 C2_U_eight_neopixels4.2 C2_U_eight_neopixels5.2 C2_U_eight_neopixels6.2 C2_U_eight_neopixels7.2 C2_U_eight_neopixels8.2 C3_U_eight_neopixels1.2 C3_U_eight_neopixels2.2 C3_U_eight_neopixels3.2 C3_U_eight_neopixels4.2 C3_U_eight_neopixels5.2 C3_U_eight_neopixels6.2 C3_U_eight_neopixels7.2 C3_U_eight_neopixels8.2 C4_U_eight_neopixels1.2 C4_U_eight_neopixels2.2 C4_U_eight_neopixels3.2 C4_U_eight_neopixels4.2 C4_U_eight_neopixels5.2 C4_U_eight_neopixels6.2 C4_U_eight_neopixels7.2 C4_U_eight_neopixels8.2 C5_U_eight_neopixels1.2 C5_U_eight_neopixels2.2 C5_U_eight_neopixels3.2 C5_U_eight_neopixels4.2 C5_U_eight_neopixels5.2 C5_U_eight_neopixels6.2 C5_U_eight_neopixels7.2 C5_U_eight_neopixels8.2 C6_U_eight_neopixels1.2 C6_U_eight_neopixels2.2 C6_U_eight_neopixels3.2 C6_U_eight_neopixels4.2 C6_U_eight_neopixels5.2 C6_U_eight_neopixels6.2 C6_U_eight_neopixels7.2 C6_U_eight_neopixels8.2 C7_U_eight_neopixels1.2 C7_U_eight_neopixels2.2 C7_U_eight_neopixels3.2 C7_U_eight_neopixels4.2 C7_U_eight_neopixels5.2 C7_U_eight_neopixels6.2 C7_U_eight_neopixels7.2 C7_U_eight_neopixels8.2 J0.1 U0_U_eight_neopixels1.1 U0_U_eight_neopixels2.1 U0_U_eight_neopixels3.1 U0_U_eight_neopixels4.1 U0_U_eight_neopixels5.1 U0_U_eight_neopixels6.1 U0_U_eight_neopixels7.1 U0_U_eight_neopixels8.1 U1_U_eight_neopixels1.1 U1_U_eight_neopixels2.1 U1_U_eight_neopixels3.1 U1_U_eight_neopixels4.1 U1_U_eight_neopixels5.1 U1_U_eight_neopixels6.1 U1_U_eight_neopixels7.1 U1_U_eight_neopixels8.1 U2_U_eight_neopixels1.1 U2_U_eight_neopixels2.1 U2_U_eight_neopixels3.1 U2_U_eight_neopixels4.1 U2_U_eight_neopixels5.1 U2_U_eight_neopixels6.1 U2_U_eight_neopixels7.1 U2_U_eight_neopixels8.1 U3_U_eight_neopixels1.1 U3_U_eight_neopixels2.1 U3_U_eight_neopixels3.1 U3_U_eight_neopixels4.1 U3_U_eight_neopixels5.1 U3_U_eight_neopixels6.1 U3_U_eight_neopixels7.1 U3_U_eight_neopixels8.1 U4_U_eight_neopixels1.1 U4_U_eight_neopixels2.1 U4_U_eight_neopixels3.1 U4_U_eight_neopixels4.1 U4_U_eight_neopixels5.1 U4_U_eight_neopixels6.1 U4_U_eight_neopixels7.1 U4_U_eight_neopixels8.1 U5_U_eight_neopixels1.1 U5_U_eight_neopixels2.1 U5_U_eight_neopixels3.1 U5_U_eight_neopixels4.1 U5_U_eight_neopixels5.1 U5_U_eight_neopixels6.1 U5_U_eight_neopixels7.1 U5_U_eight_neopixels8.1 U6_U_eight_neopixels1.1 U6_U_eight_neopixels2.1 U6_U_eight_neopixels3.1 U6_U_eight_neopixels4.1 U6_U_eight_neopixels5.1 U6_U_eight_neopixels6.1 U6_U_eight_neopixels7.1 U6_U_eight_neopixels8.1 U7_U_eight_neopixels1.1 U7_U_eight_neopixels2.1 U7_U_eight_neopixels3.1 U7_U_eight_neopixels4.1 U7_U_eight_neopixels5.1 U7_U_eight_neopixels6.1 U7_U_eight_neopixels7.1 U7_U_eight_neopixels8.1 | length 225.6
  Top Layer w0.381: v1(9.7,21.4) 9.7,21.314 9.776,21.238 9.776,19.605 U0_U_eight_neopixels2.1@9.752,19.581 ; v1(9.7,38.1) 9.728,38.072 9.728,36.558 U0_U_eight_neopixels8.1@9.704,36.534 ; U0_U_eight_neopixels6.1@9.7,53.5 9.724,53.524 9.724,55.238 9.8,55.314 v1(9.8,55.4) ; U0_U_eight_neopixels4.1@9.852,2.755 9.876,2.779 9.876,4.476 v1(9.9,4.5) ; v1(12.8,65) U7_U_eight_neopixels5.1@12.8,66.6 ; v1(12.9,31.2) U7_U_eight_neopixels1.1@12.9,32.75 ; U7_U_eight_neopixels3.1@12.948,15.845 12.974,15.819 12.974,14.326 v1(13,14.3) ; U7_U_eight_neopixels7.1@12.948,49.645 12.974,49.619 12.974,48.026 v1(13,48) ; v1(15.6,38.2) 15.652,38.148 15.652,36.586 U1_U_eight_neopixels8.1@15.704,36.534 ; U1_U_eight_neopixels6.1@15.7,53.5 15.674,53.526 15.674,55.274 v1(15.7,55.3) ; U1_U_eight_neopixels2.1@15.752,19.581 15.726,19.607 15.726,21.14 15.8,21.214 v1(15.8,21.3) ; U1_U_eight_neopixels4.1@15.852,2.755 15.826,2.781 15.826,4.24 15.9,4.314 v1(15.9,4.4) ; U6_U_eight_neopixels5.1@18.802,66.605 18.851,66.556 18.851,65.049 v1(18.9,65) ; v1(18.9,31.1) v1(18.9,31.1) 18.901,32.754 U6_U_eight_neopixels1.1@18.902,32.755 ; U6_U_eight_neopixels3.1@18.95,15.85 18.975,15.825 18.975,14.325 v1(19,14.3) ; U6_U_eight_neopixels7.1@18.95,49.65 18.975,49.625 18.975,48.125 v1(19,48.1) ; v1(21.6,55.4) 21.65,55.35 21.65,53.55 U2_U_eight_neopixels6.1@21.7,53.5 ; v1(21.7,21.4) 21.726,21.374 21.726,19.607 U2_U_eight_neopixels2.1@21.752,19.581 ; v1(21.7,38.3) 21.702,38.298 21.702,36.536 U2_U_eight_neopixels8.1@21.704,36.534 ; v1(21.8,4.5) 21.826,4.474 21.826,2.781 U2_U_eight_neopixels4.1@21.852,2.755 ; v1(24.8,65) U5_U_eight_neopixels5.1@24.8,66.6 ; v1(24.9,14.1) 24.924,14.124 24.924,15.821 U5_U_eight_neopixels3.1@24.948,15.845 ; v1(24.9,31) U5_U_eight_neopixels1.1@24.9,32.75 ; v1(24.9,48) 24.924,48.024 24.924,49.621 U5_U_eight_neopixels7.1@24.948,49.645 ; v1(27.6,55.3) 27.65,55.25 27.65,53.55 U3_U_eight_neopixels6.1@27.7,53.5 ; v1(27.7,21.3) 27.726,21.274 27.726,19.607 U3_U_eight_neopixels2.1@27.752,19.581 ; v1(27.7,38.3) 27.702,38.298 27.702,36.536 U3_U_eight_neopixels8.1@27.704,36.534 ; v1(27.8,4.5) 27.826,4.474 27.826,2.781 U3_U_eight_neopixels4.1@27.852,2.755 ; v1(30.8,65) U4_U_eight_neopixels5.1@30.8,66.6 ; v1(30.9,31.1) U4_U_eight_neopixels1.1@30.9,32.75 ; U4_U_eight_neopixels3.1@30.948,15.845 30.974,15.819 30.974,14.126 v1(31,14.1) ; U4_U_eight_neopixels7.1@30.948,49.645 30.974,49.619 30.974,47.926 v1(31,47.9) ; v1(33.8,21.4) 33.826,21.374 33.826,19.607 U4_U_eight_neopixels2.1@33.852,19.581 ; v1(33.8,38.3) 33.802,38.298 33.802,36.537 U4_U_eight_neopixels8.1@33.804,36.535 ; U4_U_eight_neopixels6.1@33.8,53.5 v1(33.8,55.2) ; v1(33.9,4.5) 33.926,4.474 33.926,2.781 U4_U_eight_neopixels4.1@33.952,2.755 ; v1(36.9,64.9) U3_U_eight_neopixels5.1@36.9,66.6 ; v1(37,14.2) 37.024,14.224 37.024,15.821 U3_U_eight_neopixels3.1@37.048,15.845 ; U3_U_eight_neopixels1.1@37,32.75 37.05,32.7 37.05,31.05 v1(37.1,31) ; U3_U_eight_neopixels7.1@37.048,49.645 37.074,49.619 37.074,47.926 v1(37.1,47.9) ; U5_U_eight_neopixels6.1@39.8,53.5 v1(39.8,55.3) ; U5_U_eight_neopixels8.1@39.804,36.535 39.852,36.582 39.852,38.152 v1(39.9,38.2) ; U5_U_eight_neopixels2.1@39.852,19.581 39.876,19.605 39.876,21.176 v1(39.9,21.2) ; U5_U_eight_neopixels4.1@39.952,2.755 39.976,2.779 39.976,4.476 v1(40,4.5) ; v1(42.9,64.9) U2_U_eight_neopixels5.1@42.9,66.6 ; v1(43,31) U2_U_eight_neopixels1.1@43,32.75 ; U2_U_eight_neopixels3.1@43.048,15.845 43.074,15.819 43.074,14.226 v1(43.1,14.2) ; U2_U_eight_neopixels7.1@43.048,49.645 43.074,49.619 43.074,47.926 v1(43.1,47.9) ; U6_U_eight_neopixels6.1@45.798,53.495 U6_U_eight_neopixels6.1@45.798,53.495 v1(45.8,55) v1(45.8,55) ; v1(45.8,21.2) 45.825,21.175 45.825,19.601 U6_U_eight_neopixels2.1@45.85,19.576 ; v1(45.8,38.3) 45.801,38.299 U6_U_eight_neopixels8.1@45.801,36.531 ; v1(45.9,4.3) 45.925,4.275 45.925,2.775 U6_U_eight_neopixels4.1@45.95,2.75 ; U1_U_eight_neopixels5.1@48.9,66.6 48.95,66.55 48.95,64.95 v1(49,64.9) ; U1_U_eight_neopixels1.1@49,32.75 49.05,32.7 49.05,31.25 v1(49.1,31.2) ; v1(49,47.8) 49,47.886 49.074,47.96 49.074,49.619 U1_U_eight_neopixels7.1@49.048,49.645 ; U1_U_eight_neopixels3.1@49.048,15.845 49.074,15.819 49.074,14.212 49.2,14.086 v1(49.2,14) ; v1(51.8,21.2) 51.826,21.174 51.826,19.607 U7_U_eight_neopixels2.1@51.852,19.581 ; v1(51.8,38.1) 51.802,38.098 51.802,36.537 U7_U_eight_neopixels8.1@51.804,36.535 ; U7_U_eight_neopixels6.1@51.8,53.5 v1(51.8,55.2) ; v1(51.9,4.7) 51.926,4.674 51.926,2.781 U7_U_eight_neopixels4.1@51.952,2.755 ; v1(54.8,65) 54.8,65.086 54.876,65.162 54.876,66.576 U0_U_eight_neopixels5.1@54.9,66.6 ; v1(55,31.1) U0_U_eight_neopixels1.1@55,32.75 ; v1(55,47.8) 55.024,47.824 55.024,49.621 U0_U_eight_neopixels7.1@55.048,49.645 ; U0_U_eight_neopixels3.1@55.048,15.845 55.024,15.821 55.024,14.188 55.287,13.925 v1(55.287,13.838) ; U6_U_eight_neopixels8.1@45.801,36.531 U6_U_eight_neopixels8.1@45.802,36.53
  Bottom Layer w0.381: v1(9.7,21.4) 9.786,21.4 10.261,20.926 C4_U_eight_neopixels2.2@11.5,20.926 ; v1(9.7,38.1) 9.786,38.1 10.007,37.879 C4_U_eight_neopixels8.2@11.452,37.879 ; v1(9.8,55.4) 9.886,55.4 10.332,54.954 11.339,54.954 C4_U_eight_neopixels6.2@11.448,54.845 ; v1(9.9,4.5) 9.986,4.5 10.386,4.1 C4_U_eight_neopixels4.2@11.6,4.1 ; C3_U_eight_neopixels5.2@11.2,65.2 12.514,65.2 12.714,65 v1(12.8,65) ; C3_U_eight_neopixels1.2@11.3,31.35 12.664,31.35 12.814,31.2 v1(12.9,31.2) ; C3_U_eight_neopixels3.2@11.348,14.445 12.769,14.445 12.914,14.3 v1(13,14.3) ; C3_U_eight_neopixels7.2@11.348,48.245 12.669,48.245 12.914,48 v1(13,48) ; v1(15.6,38.2) 15.686,38.2 15.952,37.934 C5_U_eight_neopixels8.2@17.404,37.934 ; v1(15.7,55.3) 15.786,55.3 16.186,54.9 C5_U_eight_neopixels6.2@17.4,54.9 ; v1(15.8,21.3) 15.886,21.3 16.206,20.981 C5_U_eight_neopixels2.2@17.452,20.981 ; v1(15.9,4.4) 15.986,4.4 16.231,4.155 C5_U_eight_neopixels4.2@17.552,4.155 ; C2_U_eight_neopixels5.2@17.1,65.2 18.614,65.2 18.814,65 v1(18.9,65) ; C2_U_eight_neopixels1.2@17.2,31.35 18.564,31.35 18.814,31.1 v1(18.9,31.1) ; C2_U_eight_neopixels3.2@17.248,14.445 17.332,14.361 18.939,14.361 v1(19,14.3) ; C2_U_eight_neopixels7.2@17.248,48.245 17.332,48.161 18.939,48.161 v1(19,48.1) ; v1(21.6,55.4) 21.686,55.4 22.186,54.9 C6_U_eight_neopixels6.2@23.4,54.9 ; v1(21.7,21.4) 21.786,21.4 22.206,20.981 C6_U_eight_neopixels2.2@23.452,20.981 ; v1(21.7,38.3) 21.786,38.3 22.152,37.934 C6_U_eight_neopixels8.2@23.404,37.934 ; v1(21.8,4.5) 21.886,4.5 22.231,4.155 C6_U_eight_neopixels4.2@23.552,4.155 ; C1_U_eight_neopixels5.2@23.2,65.2 24.514,65.2 24.714,65 v1(24.8,65) ; C1_U_eight_neopixels1.2@23.3,31.35 23.333,31.317 24.496,31.317 24.814,31 v1(24.9,31) ; C1_U_eight_neopixels3.2@23.348,14.445 23.424,14.369 24.545,14.369 24.814,14.1 v1(24.9,14.1) ; C1_U_eight_neopixels7.2@23.348,48.245 24.569,48.245 24.814,48 v1(24.9,48) ; v1(27.6,55.3) 27.686,55.3 28.041,54.945 C7_U_eight_neopixels6.2@29.348,54.945 ; v1(27.7,21.3) 27.786,21.3 28.061,21.026 C7_U_eight_neopixels2.2@29.4,21.026 ; v1(27.7,38.3) 27.786,38.3 28.107,37.979 C7_U_eight_neopixels8.2@29.352,37.979 ; v1(27.8,4.5) 27.886,4.5 28.186,4.2 C7_U_eight_neopixels4.2@29.5,4.2 ; C0_U_eight_neopixels5.2@29.3,65.2 30.514,65.2 30.714,65 v1(30.8,65) ; C0_U_eight_neopixels1.2@29.4,31.35 29.433,31.317 30.596,31.317 30.814,31.1 v1(30.9,31.1) ; C0_U_eight_neopixels3.2@29.448,14.445 29.524,14.369 30.645,14.369 30.914,14.1 v1(31,14.1) ; C0_U_eight_neopixels7.2@29.448,48.245 29.524,48.169 30.645,48.169 30.914,47.9 v1(31,47.9) ; v1(33.8,21.4) 33.886,21.4 34.196,21.09 35.242,21.09 C0_U_eight_neopixels2.2@35.352,20.981 ; v1(33.8,38.3) 33.886,38.3 34.142,38.044 35.195,38.044 C0_U_eight_neopixels8.2@35.304,37.934 ; v1(33.8,55.2) 33.886,55.2 34.104,54.983 35.217,54.983 C0_U_eight_neopixels6.2@35.3,54.9 ; v1(33.9,4.5) 33.986,4.5 34.256,4.231 35.376,4.231 C0_U_eight_neopixels4.2@35.452,4.155 ; C7_U_eight_neopixels5.2@35.252,65.155 36.559,65.155 36.814,64.9 v1(36.9,64.9) ; C7_U_eight_neopixels1.2@35.352,31.305 36.709,31.305 37.014,31 v1(37.1,31) ; C7_U_eight_neopixels3.2@35.4,14.4 36.714,14.4 36.914,14.2 v1(37,14.2) ; C7_U_eight_neopixels7.2@35.4,48.2 36.714,48.2 37.014,47.9 v1(37.1,47.9) ; v1(39.8,55.3) 39.886,55.3 40.204,54.983 41.317,54.983 C1_U_eight_neopixels6.2@41.4,54.9 ; v1(39.9,21.2) 39.986,21.2 40.206,20.981 C1_U_eight_neopixels2.2@41.452,20.981 ; v1(39.9,38.2) 39.986,38.2 40.208,37.979 41.36,37.979 C1_U_eight_neopixels8.2@41.404,37.934 ; v1(40,4.5) 40.086,4.5 40.356,4.231 41.476,4.231 C1_U_eight_neopixels4.2@41.552,4.155 ; C6_U_eight_neopixels5.2@41.2,65.2 42.514,65.2 42.814,64.9 v1(42.9,64.9) ; C6_U_eight_neopixels1.2@41.3,31.35 42.564,31.35 42.914,31 v1(43,31) ; C6_U_eight_neopixels3.2@41.348,14.445 42.769,14.445 43.014,14.2 v1(43.1,14.2) ; C6_U_eight_neopixels7.2@41.348,48.245 42.669,48.245 43.014,47.9 v1(43.1,47.9) ; v1(45.8,21.2) 45.886,21.2 46.106,20.981 C2_U_eight_neopixels2.2@47.552,20.981 ; v1(45.8,38.3) 45.886,38.3 46.252,37.934 C2_U_eight_neopixels8.2@47.504,37.934 ; v1(45.8,55) 45.85,54.95 47.45,54.95 C2_U_eight_neopixels6.2@47.5,54.9 ; v1(45.9,4.3) 45.961,4.239 47.568,4.239 C2_U_eight_neopixels4.2@47.652,4.155 ; C5_U_eight_neopixels5.2@47.2,65.2 48.614,65.2 48.914,64.9 v1(49,64.9) ; C5_U_eight_neopixels1.2@47.3,31.35 48.864,31.35 49.014,31.2 v1(49.1,31.2) ; C5_U_eight_neopixels3.2@47.348,14.445 48.669,14.445 49.114,14 v1(49.2,14) ; C5_U_eight_neopixels7.2@47.348,48.245 47.424,48.169 48.545,48.169 48.914,47.8 v1(49,47.8) ; v1(51.8,21.2) 51.886,21.2 52.096,20.99 53.442,20.99 C3_U_eight_neopixels2.2@53.452,20.981 ; v1(51.8,38.1) 52.746,38.1 52.802,38.044 53.295,38.044 C3_U_eight_neopixels8.2@53.404,37.934 ; v1(51.8,55.2) 51.886,55.2 52.186,54.9 C3_U_eight_neopixels6.2@53.4,54.9 ; v1(51.9,4.7) 52.336,4.264 53.443,4.264 C3_U_eight_neopixels4.2@53.552,4.155 ; C4_U_eight_neopixels5.2@53.152,65.255 54.459,65.255 54.714,65 v1(54.8,65) ; C4_U_eight_neopixels1.2@53.252,31.405 54.609,31.405 54.914,31.1 v1(55,31.1) ; C4_U_eight_neopixels3.2@53.3,14.5 54.626,14.5 v1(55.287,13.838) ; C4_U_eight_neopixels7.2@53.3,48.3 53.383,48.217 54.497,48.217 54.914,47.8 v1(55,47.8)

## Polygon pours and split planes (outlines as drawn)
VCC_U_eight_neopixels1 on Top Layer "NONET_L01_P-001" (solid, pour order 22): -0.053,4.5 -0.053,65.5 cw(c4.447,65.5) 4.447,70 60.447,70 cw(c60.447,65.5) 64.947,65.5 64.947,4.4 cw(c60.497,4.45) 60.447,0 4.447,0 cw(c4.447,4.5)
GND_U_eight_neopixels1 on Top Layer "NONET_L01_P-001" (solid, pour order 17): 53.4,55.235 53.4,52.1 55.1,52.1 55.828,51.372 55.775,46.5 57.95,46.5 57.95,51.45 56.219,53.1 56.219,55.424
GND_U_eight_neopixels1 on Top Layer "NONET_L01_P-001" (solid, pour order 20): 54.9,18.7 56.1,17.5 56.1,17.3 56.1,17.2 56.1,9.5 58.6,9.5 58.6,18.2 58.4,18.4 56.6,20.2
GND_U_eight_neopixels1 on Top Layer "NONET_L01_P-001" (solid, pour order 19): 54.9,35.7 56.1,34.5 56.1,33.7 56.1,26.2 58.6,26.2 58.6,35.2 58.4,35.4 56.6,37.2
GND_U_eight_neopixels1 on Top Layer "GND_U_EIGHT_NEOPIXELS1_L01_P001" (solid, pour order 1): 7.1,56.3 11.4,56.3 11.4,52.2 14.4,52.2 14.4,55.7 15,56.3 17.3,56.3 17.4,56.2 17.4,52.2 20.4,52.2 20.4,55.4 21.3,56.3 23.3,56.3 23.4,56.2 23.4,52.2 26.4,52.2 26.4,55.3 27.4,56.3 29.4,56.3 29.4,52.2 32.47,52.2 32.47,56.2 35.3,56.3 35.3,52.2 38.4,52.2 38.4,55.3 39.3,56.2 41.4,56.2 41.4,52.2 44.5,52.2 44.5,55.3 45.3,56.1 47.6,56.1 47.7,56 47.7,52.2 50.4,52.2 50.4,55.235 51.465,56.3 53.4,56.3 53.4,55.135 61.4,55.135 61.4,60.1 7.1,60.1
GND_U_eight_neopixels1 on Top Layer "GND_U_EIGHT_NEOPIXELS1_L01_P010" (solid, pour order 10): 61.4,63.9 53.308,63.9 53.308,68.1 50.308,68.1 50.308,64.5 49.708,63.9 47.408,63.9 47.308,64 47.308,68.1 44.308,68.1 44.308,64.8 43.408,63.9 41.408,63.9 41.308,64 41.308,68.1 38.308,68.1 38.308,64.9 37.308,63.9 35.308,63.9 35.308,68.1 32.238,68.1 32.238,64 29.408,63.9 29.408,68.1 26.308,68.1 26.308,64.9 25.408,64 23.308,64 23.308,68.1 20.208,68.1 20.208,64.9 19.408,64.1 17.108,64.1 17.008,64.2 17.008,68.1 14.308,68.1 14.308,64.965 13.243,63.9 11.8,63.9 11.8,68.1 7.1,68.1 7.1,60.1 61.4,60.1
GND_U_eight_neopixels1 on Top Layer "GND_U_EIGHT_NEOPIXELS1_L01_P011" (solid, pour order 11): 60.3,46.8 53.3,46.8 53.3,51 50.3,51 50.3,47.4 49.7,46.8 47.4,46.8 47.3,46.9 47.3,51 44.3,51 44.3,47.7 43.4,46.8 41.4,46.8 41.3,46.9 41.3,51 38.3,51 38.3,47.8 37.3,46.8 35.3,46.8 35.3,51 32.23,51 32.23,46.9 29.4,46.8 29.4,51 26.3,51 26.3,47.8 25.4,46.9 23.3,46.9 23.3,51 20.2,51 20.2,47.8 19.4,47 17.1,47 17,47.1 17,51 14.3,51 14.3,47.865 13.235,46.8 11.3,46.8 11.3,51 7.1,51 7.1,43 60.3,43
GND_U_eight_neopixels1 on Top Layer "GND_U_EIGHT_NEOPIXELS1_L01_P012" (solid, pour order 12): 7.1,39.295 11.292,39.295 11.292,35.2 14.292,35.2 14.292,38.695 14.892,39.295 17.192,39.295 17.292,39.195 17.292,35.2 20.292,35.2 20.292,38.395 21.192,39.295 23.192,39.295 23.292,39.195 23.292,35.2 26.292,35.2 26.292,38.295 27.292,39.295 29.292,39.295 29.292,35.2 32.362,35.2 32.362,39.195 35.192,39.295 35.192,35.2 38.292,35.2 38.292,38.295 39.192,39.195 41.292,39.195 41.292,35.2 44.392,35.2 44.392,38.295 45.192,39.095 47.492,39.095 47.592,38.995 47.592,35.2 50.292,35.2 50.292,38.229 51.357,39.295 53.292,39.295 53.292,35.2 60.3,35.2 60.3,43.095 7.1,43.095
GND_U_eight_neopixels1 on Top Layer "GND_U_EIGHT_NEOPIXELS1_L01_P013" (solid, pour order 13): 7.2,22.4 11.4,22.4 11.4,18.3 14.4,18.3 14.4,21.8 15,22.4 17.3,22.4 17.4,22.3 17.4,18.3 20.4,18.3 20.4,21.5 21.3,22.4 23.3,22.4 23.4,22.3 23.4,18.3 26.4,18.3 26.4,21.4 27.4,22.4 29.4,22.4 29.4,18.3 32.47,18.3 32.47,22.3 35.3,22.4 35.3,18.3 38.4,18.3 38.4,21.4 39.3,22.3 41.4,22.3 41.4,18.3 44.5,18.3 44.5,21.4 45.3,22.2 47.6,22.2 47.7,22.1 47.7,18.3 50.4,18.3 50.4,21.335 51.465,22.4 53.4,22.4 53.4,18.3 58.6,18.3 58.6,26.2 7.2,26.2
GND_U_eight_neopixels1 on Top Layer "GND_U_EIGHT_NEOPIXELS1_L01_P014" (solid, pour order 14): 57.908,30 53.308,30 53.308,34.2 50.308,34.2 50.308,30.6 49.708,30 47.408,30 47.308,30.1 47.308,34.2 44.308,34.2 44.308,30.9 43.408,30 41.408,30 41.308,30.1 41.308,34.2 38.308,34.2 38.308,31 37.308,30 35.308,30 35.308,34.2 32.238,34.2 32.238,30.1 29.408,30 29.408,34.2 26.308,34.2 26.308,31 25.408,30.1 23.308,30.1 23.308,34.2 20.208,34.2 20.208,31 19.408,30.2 17.108,30.2 17.008,30.3 17.008,34.2 14.308,34.2 14.308,31.065 13.243,30 11.308,30 11.308,34.2 7.2,34.2 7.2,26.2 57.908,26.2
GND_U_eight_neopixels1 on Top Layer "GND_U_EIGHT_NEOPIXELS1_L01_P015" (solid, pour order 15): 58.6,12.9 53.3,12.9 53.3,17.4 50.3,17.4 50.3,13.5 49.7,12.9 47.4,12.9 47.3,13 47.3,17.4 44.3,17.4 44.3,13.8 43.4,12.9 41.4,12.9 41.3,13 41.3,17.4 38.3,17.4 38.3,13.9 37.3,12.9 35.3,12.9 35.3,17.4 32.23,17.4 32.23,13 29.4,12.9 29.4,17.4 26.3,17.4 26.3,13.9 25.4,13 23.3,13 23.3,17.4 20.2,17.4 20.2,13.9 19.4,13.1 17.1,13.1 17,13.2 17,17.4 14.3,17.4 14.3,13.965 13.235,12.9 11.3,12.9 11.3,17.4 7.1,17.4 7.1,9.1 58.6,9.1
GND_U_eight_neopixels1 on Top Layer "GND_U_EIGHT_NEOPIXELS1_L01_P016" (solid, pour order 16): 7.1,5.395 11.292,5.395 11.292,0.995 14.292,0.995 14.292,4.795 14.892,5.395 17.192,5.395 17.292,5.295 17.292,0.995 20.292,0.995 20.292,4.495 21.192,5.395 23.192,5.395 23.292,5.295 23.292,0.995 26.292,0.995 26.292,4.395 27.292,5.395 29.292,5.395 29.292,0.995 32.362,0.995 32.362,5.295 35.192,5.395 35.192,0.995 38.292,0.995 38.292,4.395 39.192,5.295 41.292,5.295 41.292,0.995 44.392,0.995 44.392,4.395 45.192,5.195 47.492,5.195 47.592,5.095 47.592,0.995 50.292,0.995 50.292,4.329 51.357,5.395 53.292,5.395 53.292,0.995 58.6,0.995 58.6,9.195 7.1,9.195
GND_U_eight_neopixels1 on Bottom Layer "NONET_L01_P-001" (hatched 90Degree grid 0.508 track 0.203, pour order 23): 0,4.5 0,65.5 cw(c4.5,65.5) 4.5,70 60.5,70 cw(c60.5,65.5) 65,65.5 65,4.4 cw(c60.55,4.45) 60.5,0 4.5,0 cw(c4.5,4.5)

## Keep-outs
Keep-Out Layer:
  lines w0.2: 0,4.5 ccw(c4.5,4.5) 4.5,0 ; 0,65.5 cw(c4.5,65.5) 4.5,70 ; 60.5,0 ccw(c60.55,4.45) 65,4.4 ; 60.5,70 cw(c60.5,65.5) 65,65.5
  lines w0.254: 0,4.5 0,65.5 ; 4.5,0 60.5,0 ; 4.5,70 60.5,70 ; 65,4.4 65,65.5 ; 0,65.5 0,65.5

## Silkscreen, mask and mechanical layers (free items; w line width, h text height)
Top Overlay:
  drawing of 19 lines, arcs and shapes, not listed
  text "8x8 NeoPixel Matrix / Designed by Erik Neff-Flahan" at 5.633,16.9 h1 r90
Bottom Overlay:
  drawing of 99 lines, arcs and shapes, not listed